# Altium PCB TN2020C.PCBDOC (part 2 of 2)
Units mil, origin at the board's own origin, x right, y up, seen from the top; angles counter-clockwise.
Board outline 6880.03 x 4310.03 mil, 2 copper layers (Top Layer, Bottom Layer); 174 components, 0 nets, 620 pads, 52 vias.
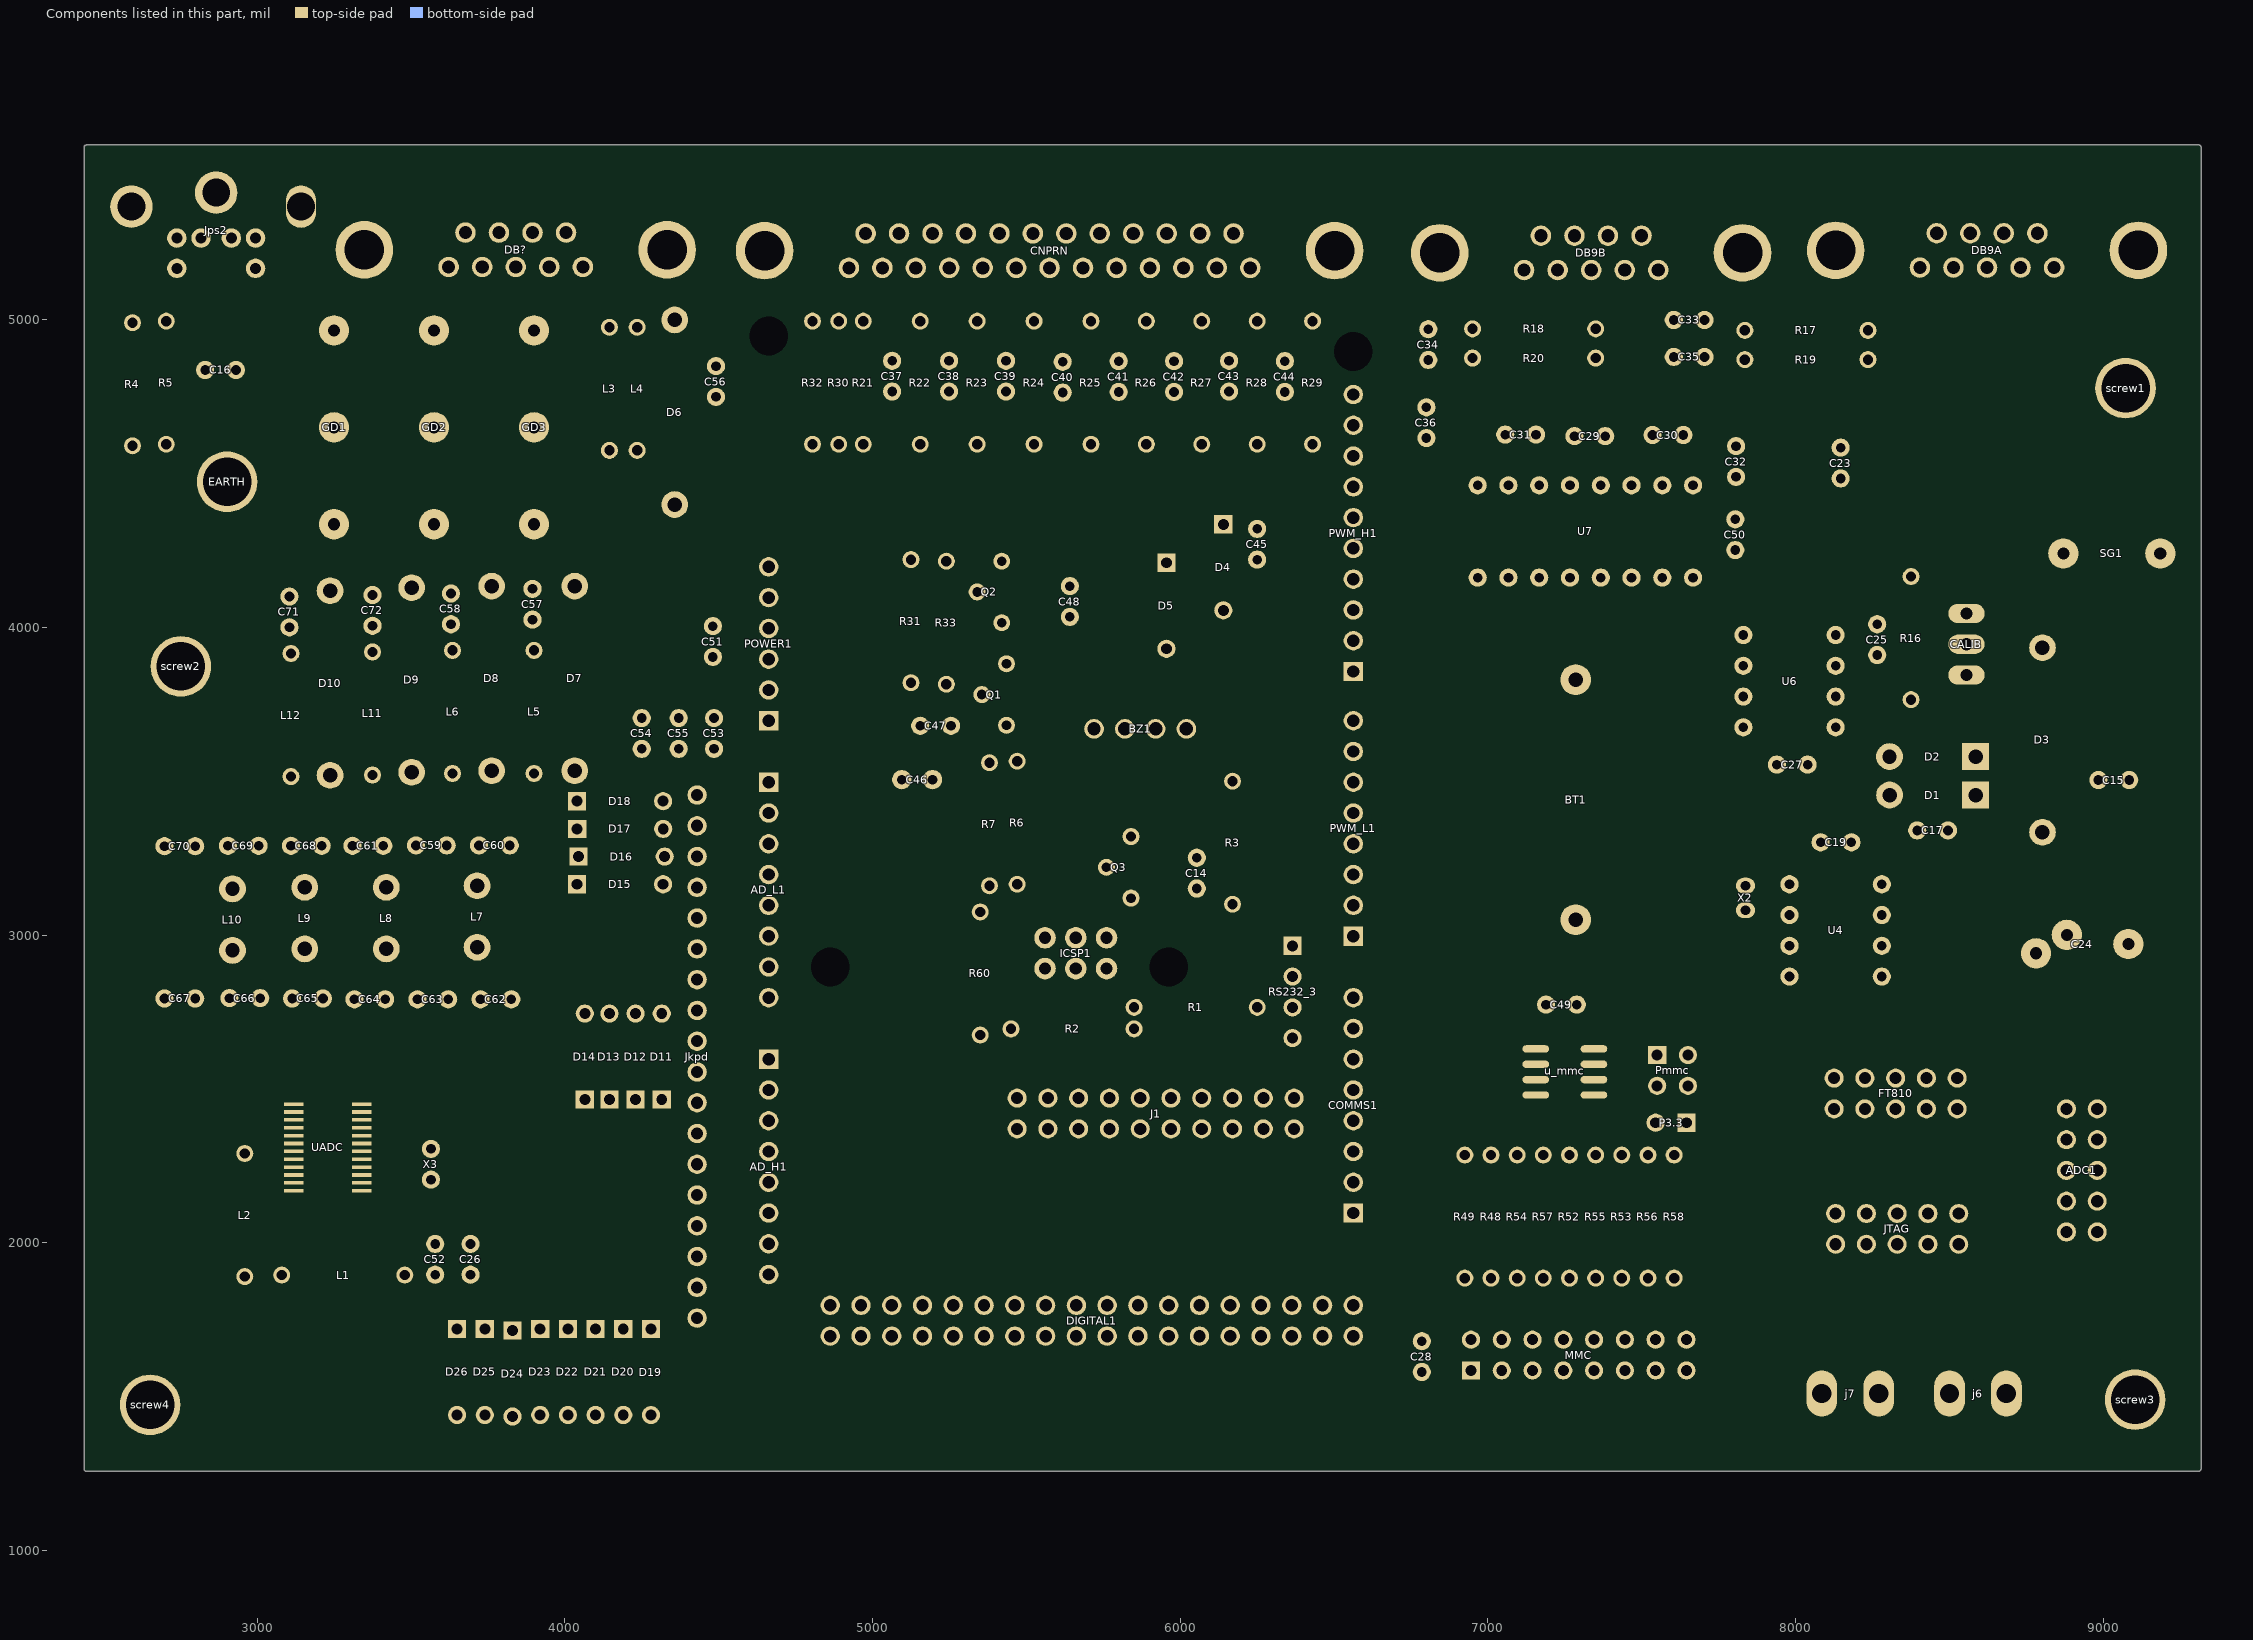
[diagram p2: the components of this part, seen from the top]

## Via types
v1: diameter 50, hole 28, Top Layer to Bottom Layer, 52 vias

## Nets (pads, with @x,y where several pads share a name; then routed paths per layer and width w, separated by ;. In a path a pad name is that pad's centre, name@x,y a point inside that pad or via, vN(x,y) a via of type N, cw(c..) or ccw(c..) an arc to the next point about the centre after c; other vN are vias at no path point) (continued)
copper on no net: | length 314893.9
  Top Layer w12: 2698.85,2793.74 2698.85,2406.15 2757.05,2347.95 3119.53,2347.95 3187.97,2347.95 3195,2340.92 3195,2296.77 ; 2865,2220 3119.53,2220 ; 2890,2195 2991.77,2195 2992.36,2194.41 3119.53,2194.41 ; 2908.82,2168.82 3119.53,2168.82 ; 2910,2795 2910,2555 2925,2540 3385,2540 3405,2520 3405,2457.34 3397.97,2450.31 3340,2450.31 ; v1(2915.28,2420) 2936.15,2399.13 3119.53,2399.13 ; 2960,1890 2962.5,1892.5 3077.5,1892.5 3080,1895 3160,1975 3442.97,1975 3450,1982.03 3450,2155 3436.18,2168.82 3340,2168.82 ; v1(3000,2485) 2845,2485 2820,2460 2820,2385 2831.46,2373.54 3119.53,2373.54 ; 3010,2795 3010.63,2794.37 3113.22,2794.37 3113.85,2793.74 ; 3119.53,2245.59 3187.97,2245.59 3195,2252.62 3195,2296.77 ; 3119.53,2271.18 2990.49,2271.18 2971.67,2290 2960,2290 2966.68,2296.68 ; 3119.53,2296.77 3119.43,2296.68 2966.68,2296.68 ; 3119.53,2322.36 2992.36,2322.36 2966.68,2296.68 ; 3119.53,2424.72 3254.72,2424.72 3255,2425 ; 3119.53,2450.31 3229.69,2450.31 3255,2425 ; 3155,2955 3155,2950.32 3113.85,2909.17 3113.85,2793.74 ; 3340,2220 3537.27,2220 3552.27,2205 3565,2205 ; 3340,2245.59 3510.59,2245.59 3565,2300 3565,2305 ; 3340,2271.18 3266.18,2271.18 3265,2270 ; 3340,2296.77 3266.77,2296.77 3265,2295 ; 3340,2322.36 3267.36,2322.36 3265,2320 ; 3340,2347.95 3272.03,2347.95 3265,2340.92 ; 3340,2373.54 3743.54,2373.54 v1(3770.74,2400.74) ; 3340,2399.13 3669.13,2399.13 v1(3770,2500) ; 3340,2424.72 3424.72,2424.72 3450,2450 3450,2555 3425,2580 3127.03,2580 3113.85,2593.18 3113.85,2793.74 ; 3693.74,1996.15 3578.74,1996.15 3578.74,2091.26 3475.59,2194.41 3340,2194.41 3272.03,2194.41 3265,2201.44 3265,2270 ; v1(4870,3180) 4905,3215 5325,3215 5380,3160 ; v1(5090,1940) 5097.27,1932.73 5097.27,1897.73 5115.06,1879.94 5115.06,1743.99 5162.56,1696.49 ; v1(5225,1960) 5225,1890 5210,1875 5210,1818.92 5210.06,1818.87 5210.06,1748.99 5262.56,1696.49 ; v1(5240,2845) 5234,2851 5191,2851 5160,2820 5160,2375 5300,2235 5565,2235 5961.04,1838.96 5961.04,1798 5962.56,1796.49 ; v1(5320,1905) 5315.06,1900.06 5315.06,1743.99 5362.56,1696.49 ; v1(5425,1920) 5425,1909.72 5415.06,1899.77 5415.06,1743.99 5462.56,1696.49 ; v1(5450,2030) 5510.06,1969.94 5510.06,1748.99 5562.56,1696.49 ; 5570,2370 5570,2261.11 5901.11,1930 6060,1930 6115.06,1874.94 6115.06,1743.99 6162.56,1696.49 ; v1(5625,2000) 5625,1831.11 5610.06,1816.16 5610.06,1746.97 5612.03,1745 5614.04,1745 5662.56,1696.49 ; 5670,2370 5670,2255 5938.5,1986.5 6106.73,1986.5 6210.06,1883.18 6210.06,1748.99 6262.56,1696.49 ; 5770,2370 5770,2225 5950,2045 6185,2045 6315.06,1914.94 6315.06,1743.99 6362.56,1696.49 ; 5770,2470 5823,2417 5823,2204.03 5952.03,2075 6200,2075 6362.56,1912.44 6362.56,1796.49 ; 5862.56,1796.49 5862.56,1897.44 5565.03,2194.97 5285.03,2194.97 5115,2365 5115,2850 5180,2915 5318.89,2915 5630,3226.11 5630,3426.11 5703.89,3500 6013.89,3500 6140,3626.11 6140,4055.24 ; 5870,2470 5923,2417 5923,2179.03 5962.03,2140 6225,2140 6462.56,1902.44 6462.56,1796.49 ; v1(6015,1870) 6015,1744.04 6062.56,1696.49 ; 6070,2470 6117,2423 6117,2263 6125,2255 v1(6365,2255) ; 6250,2765 6250,2764.51 6223,2737.51 6223,2417 6270,2370 ; 6806.26,4868.85 6857.41,4920 7155,4920 ; 7285,3830 7475,3830 7820,3485 8260.71,3485 8290.71,3455 8305.24,3455 ; 7603.85,4878.74 7603.85,4998.74 ; 7836.86,3080.58 7844.35,3073.08 7971.92,3073.08 7980,3065 ; 7836.86,3160.58 7839.07,3162.79 7977.79,3162.79 7980,3165 7980,3275 8006.26,3301.26 8081.15,3301.26 ; 8125,2535 8172.51,2487.49 8172.51,2367.49 8205,2335 8665,2335 8690,2360 ; 8365,4095 8375,4105 8375,4165 ; 8880,2135 8980,2135 ; v1(9145,2135) 9225,2135 9230,2130 ; 3195,2296.77 3263.23,2296.77 3265,2295 ; 3255,2425 3265,2415 3265,2340.92 ; 3265,2270 3265,2295 ; 3265,2295 3265,2320 ; 3265,2320 3265,2340.92
  Top Layer w15: 2595,4590 2595,4415 2960,4050 2960,3755 3062.97,3652.03 4504.48,3652.03 4561.51,3595 4765,3595 4860,3690 v1(5070,3690) ; 2705,4595 2705,4506.45 2977.45,4234 v1(3431,4234) ; 2865,2220 2795,2150 2795,1865 3075,1585 4480,1585 4560,1665 4560,2080 4576.49,2096.49 4662.56,2096.49 ; 2890,2195 2835,2140 2835,1875 3090.01,1619.99 3095,1615 4474.64,1615 4535,1675.36 4535,2180 4551.49,2196.49 4662.56,2196.49 ; 2908.82,2168.82 2865,2125 2865,1895 3115,1645 4460,1645 4510,1695 4510,2265 4541.49,2296.49 4662.56,2296.49 ; 3480,1895 3480.57,1895.57 3578.17,1895.57 3578.74,1896.15 3693.74,1896.15 ; 4040,3165 3981.21,3106.21 3981.21,2065 3991.21,2055 4430,2055 ; 4040,3435 3913.79,3435 3905,3426.21 3905,1845 3940,1810 4375,1810 4430,1755 ; 4040.24,3345 3940,3345 3931.21,3336.21 3931.21,1903.79 3980,1855 4430,1855 ; 4045,3255 4040,3260 3985,3260 3956.21,3231.21 3956.21,1980 3981.21,1955 4430,1955 ; 4065,2465.24 4065,2210 4120,2155 4430,2155 ; 4065,2744.76 4070,2749.76 4070,3020 4105,3055 4430,3055 4515,3055 4555,3095 4661.07,3095 4662.56,3096.49 ; 4145,2465.24 4145,2300 4190,2255 4430,2255 ; 4145,2749.76 4145,2920 4180,2955 4430,2955 4535,2955 4576.49,2996.49 4662.56,2996.49 ; 4145,4575 4145,4765 4228.85,4848.85 4491.26,4848.85 ; 4230,2465.24 4235,2460.24 4235,2385 4265,2355 4430,2355 ; 4230,2744.76 4230,2825 4260,2855 4430,2855 4510,2855 4551.49,2896.49 4662.56,2896.49 ; 4315,2465.24 4325.24,2455 4430,2455 ; 4315,2744.76 4320.12,2749.88 4424.88,2749.88 4430,2755 4435,2760 4530,2760 4566.49,2796.49 4662.56,2796.49 ; 4319.76,3345 4324.76,3350 ; 4357.13,4998.94 4476.06,4998.94 4491.26,4983.74 4491.26,4848.85 ; 4425,3350 4430,3355 ; 4430,2555 4525,2555 4583.51,2496.49 4662.56,2496.49 ; 4430,2655 4604.04,2655 4662.56,2596.49 ; 4548.85,4003.85 4565,4020 4565,4825 4543.29,4846.71 4493.4,4846.71 4491.26,4848.85 ; v1(4640,4515) 4640,4355 4800,4195 4800,4105.27 4791.21,4096.49 4662.56,4096.49 ; 4662.56,4196.49 4663.3,4195.74 ; v1(4950,1375) 4952.5,1377.5 7712.5,1377.5 v1(7715,1380) ; 4962.56,1796.49 4975.54,1796.49 4996.43,1775.61 4999.39,1775.61 5013.56,1761.44 5013.56,1501.29 5031.87,1482.97 7422.97,1482.97 7445,1505 7445,1585 7445,1685 7440,1690 7440,1880 7435,1885 ; 5062.56,1696.49 5062.56,1526.29 5080.87,1507.97 7267.97,1507.97 7345,1585 7345,1685 7342.97,1687.03 7342.97,1737.03 7265,1815 7265,1885 ; 5062.56,1796.49 5062.56,1852.44 5050,1865 4930,1865 4913.56,1848.56 4913.56,1451.44 4945,1420 7490,1420 7545,1475 7545,1585 7545,1685 7545,1765 7605,1825 7605,1885 ; 5355.41,3781.47 5355.41,3595.44 5380,3570.86 5380,3560 ; 5435.41,3681.47 5435.41,3601.21 5470,3566.62 5470,3565 ; 5450,2695 5375,2620 5375,2400 5405,2370 5470,2370 ; 5470,2580 5490,2600 v1(6180,2600) 6175,2605 6175,2910 6230,2965 ; 5470,3165 5470,3420 5585,3535 5585,3580 5615,3610 5896.21,3610 5910.62,3624.41 5910.62,3660.62 5920,3670 6020,3670 ; 5570,2470 5618.5,2421.5 5618.5,2251.5 5910,1960 6100,1960 6162.56,1897.44 6162.56,1796.49 ; 5662.56,1796.49 5711.56,1747.49 5711.56,1551.29 5729.87,1532.97 7192.97,1532.97 7245,1585 7245,1685 ; 5670,2470 5718.5,2421.5 5718.5,2241.5 5940,2020 5940,2018.79 5948.79,2010 6150,2010 6262.56,1897.44 6262.56,1796.49 ; 5720,3670 5820,3670 5820,3795.24 5955,3930.24 ; 5760,3220 6011.31,3220 6042.46,3251.15 6053.74,3251.15 6143.85,3251.15 6165,3230 6165,3105 6170,3100 ; 5870,2370 5870,2198.8 5958.8,2110 6205,2110 6413.56,1901.44 6413.56,1745.49 6462.56,1696.49 ; 6053.74,3151.15 6053.74,3077.47 6166.21,2965 6230,2965 ; 6070,2370 6070,2250 6125,2195 v1(6315,2195) ; 6365,2965 6230,2965 ; 6562.56,2096.49 6921.49,2096.49 6965,2140 6965,2165 7005,2205 7005,2280 7010,2285 ; 6562.56,2196.49 6831.49,2196.49 6920,2285 6925,2285 6795,2415 6795,2730 6995,2930 7765,2930 7915,2780 8251.21,2780 8280,2808.79 8280,2865 ; 6562.56,3296.49 6569.44,3303.37 7706.03,3303.37 7832.66,3430 v1(8055,3430) ; 6562.56,3596.49 7048.51,3596.49 v1(7070,3575) ; 6562.56,3856.49 6913.51,3856.49 7190,3580 7190,3445 v1(7135,3390) ; 6562.56,3956.49 6575.54,3956.49 6594.06,3975 7830,3975 7830,3875 7830,3775 ; v1(6680,3125) 7165,3125 7200,3160 v1@7205.18,3154.82 ; v1(6735,3010) 6937.24,3010 6952.24,3025 7145,3025 7185,2985 v1(7185,2980) ; 6800,4715 6870,4715 ; 6950,4875 6915,4875 6900,4860 6900,4745 6870,4715 ; 6950,4970 6949.43,4969.43 6806.83,4969.43 6806.26,4968.85 6805.11,4970 6730,4970 6700,4940 6700,4400 6730,4370 7050,4370 7066.63,4386.63 7066.63,4461.46 ; 6966.63,4161.46 6966.63,4078.37 6985,4060 v1(7135,4060) ; 6966.63,4461.46 6888.79,4461.46 6880,4470.25 6880,4705 6870,4715 ; v1(7045,4285) 7245,4285 7265,4265 7265,4163.09 7266.63,4161.46 ; 7155.51,2530 6960,2530 6900,2590 6900,2675 6945,2720 7350,2720 7405,2775 v1(7555,2775) ; 7155.51,2580 6973.79,2580 6965,2588.79 6965,2655 6996.71,2686.71 7379.21,2686.71 7402.5,2710 7758.71,2710 7767.5,2701.21 7767.5,2427.5 7632.68,2292.68 7612.68,2292.68 7605,2285 ; 7155.51,2630 7235,2630 7245,2620 7245,2390 7187.68,2332.68 7187.68,2292.68 7180,2285 ; 7344.49,2480 7416.21,2480 7425,2471.21 7425,2450 7350,2375 7350,2285 ; 7344.49,2530 7440,2530 7450,2520 7450,2375 7435,2360 7435,2285 7520,2285 ; 7344.49,2580 7460,2580 7500,2540 7500,2520 7501.57,2518.43 7541.57,2518.43 7550,2510 ; 7344.49,2630 7450,2630 7500,2680 7733.71,2680 7742.5,2671.21 7742.5,2522.5 7725,2505 7655,2505 7650,2510 ; 7466.63,4161.46 7466.63,4228.37 7450,4245 7335,4245 7315,4225 7315,4085 7360,4040 7875,4040 7935,4100 7935,4935 7905,4965 7835,4965 7831.69,4965 7797.95,4998.74 7703.85,4998.74 ; 7666.63,4161.46 7666.63,4246.63 7670,4250 ; v1(7735,2085) 7737.5,2082.5 7737.5,1797.5 v1(7740,1795) ; v1(7910,2190) 7915,2185 7915,2140 ; v1(7915,2330) 7910,2335 7910,2690 7936.5,2716.5 8291.5,2716.5 8370,2795 8370,2875 8280,2965 ; v1(7965,2560) 7965,2565 8015,2615 8651.21,2615 8660,2606.21 8660,2400 8630,2370 8433.79,2370 8425,2378.79 8425,2435 ; v1(8075,2170) 8190.34,2170 8215.34,2195 8321.21,2195 8330,2186.21 8330,2095 ; 8125,2435 8065,2435 7995,2365 7995,2325 ; 8125,2535 8010,2535 7957.5,2482.5 7957.5,1962.5 8030,1890 8215,1890 8230,1905 8230,1995 ; 8130,1995 8055,1995 7995,2055 7995,2325 ; 8130,3675 8680,3675 8690,3665 8690,3055 v1(8500,2865) ; 8130,3875 8133.58,3875 8168.58,3910 8265,3910 ; 8146.26,4583.85 8846.15,4583.85 8865,4565 8865,4245.04 8870.04,4240 ; 8181.15,3301.26 8356.26,3301.26 8395,3340 ; v1(8225,2260) 8570,2260 8665,2165 8665,1930 ; 8280,3165 8395,3280 8395,3340 ; 8375,3765 8300,3765 8265,3800 8265,3910 ; 8530,1995 8595,1930 8665,1930 ; 8555,3945 8395,3945 8360,3910 8265,3910 ; 8555,4045 8797.13,4045 8802.13,4050 ; 8584.53,3580 8584.53,3455.24 8584.76,3455 8420,3455 8395,3430 8395,3340 ; 8690,2360 8705,2360 8780,2435 8880,2435 ; v1(8760,2655) 9106.21,2655 9115,2646.21 9115,2343.79 9106.21,2335 8980,2335 ; 8880,2235 8650,2235 8573.5,2311.5 8195.27,2311.5 8181.77,2325 7995,2325 ; 8980,2235 9066.21,2235 9075,2226.21 9075,1938.79 9066.21,1930 8665,1930
  Top Layer w15.75: 4805,4595 4805,4385 5054.35,4135.65 5054.35,3880 5114.35,3820 5125,3820 ; 4890,4595 4890,4455 5125,4220 ; 4890,4995 4890,5060 4835,5115 4835,5255 4860,5280 4977.6,5280 ; 5195,3505 5195,3620 5255,3680 5255,3687.83 5182.82,3760.01 5182.82,4162.18 5125,4220 ; 5240,4215 5340,4115 ; 5420,4015 5610.69,4015 5629.54,4033.85 5641.26,4033.85 ; 5840,3120 5845,3115 5845,2770 5850,2765 5850,2695 ; 5955,4209.76 5879.09,4133.85 5641.26,4133.85 5641.26,4253.74 5579.98,4315.02 5575,4320 5225,4320 5125,4220
  Top Layer w20: 2595,4990 2595,5105 2656.57,5166.57 2739.09,5166.57 ; 2698.85,2793.74 2698.85,3288.74 ; 2705,4995 2800,4995 2817.83,5012.83 2817.83,5265 ; 2798.85,2793.74 2799.48,2794.37 2909.37,2794.37 2910,2795 2915,2800 2915,2945 2920,2950 ; 2831.15,4836.26 2568.74,4836.26 2530,4875 ; 2867.05,5412.64 2857.56,5403.15 2768.15,5403.15 2739.09,5374.09 2739.09,5265 2635,5265 2530,5160 2530,4875 ; 2902.4,4472.99 4007.01,4472.99 4305,4175 4305,3940 4341.15,3903.85 4391.72,3903.85 ; 2920,3150 2815,3150 2798.85,3166.15 2798.85,3288.74 2799.48,3289.37 2904.37,3289.37 2905,3290 2905,3380 3040,3515 3110,3515 ; 2931.15,4836.26 3080,4985.11 3080,5180 2995,5265 ; 3005,3290 3110,3290 ; 3155,3155 3110,3200 3110,3290 ; 3210,3300.57 3210,3290 3310,3290 3313.07,3286.93 3313.07,2794.33 3316.15,2791.26 3310,2785.11 3310,2700 3325,2685 3810,2685 3826.15,2701.15 3826.15,2791.26 3823.65,2793.76 3823.65,3288.76 3821.15,3291.26 ; 3250,4650 3575,4650 3900,4650 3909.57,4640.43 3962.45,4640.43 4203.94,4398.94 4357.13,4398.94 ; 3250,4964.96 3379.96,4964.96 3530,5115 3530,5250 3562.81,5282.81 3676.99,5282.81 ; 3375,3520 3375,3440 3330,3395 3175,3395 3117.47,3337.47 3117.47,3297.47 3110,3290 ; 3375,3920 3485,3920 3502.13,3937.13 3502.13,4128.94 3484.1,4128.94 3460.16,4105 3375,4105 ; 3420,2955 3418.07,2953.07 3418.07,2793.19 3416.15,2791.26 3521.15,2791.26 ; 3420,3155 3415,3160 3415,3285 3410,3290 3410.63,3290.63 3515.52,3290.63 3516.15,3291.26 3516.15,3406.15 3635,3525 ; 3575,4335 3710,4335 3762.13,4282.87 3762.13,4133.94 ; 3575,4964.96 3579.96,4960 3725,4960 3835,5070 3925,5070 3949.63,5094.63 3949.63,5171 ; 3616.15,3291.26 3721.15,3291.26 ; 3621.15,2791.26 3726.15,2791.26 3720.57,2796.83 3720.57,2954.43 3715,2960 ; 3630,4110 3720.16,4110 3744.1,4133.94 3762.13,4133.94 ; 3635,3925 3740,3925 3760,3945 3760,4131.81 3762.13,4133.94 ; 3715,3160 3718.07,3163.07 3718.07,3288.19 3721.15,3291.26 ; 3895,4125 3899.47,4129.47 4027.66,4129.47 4030,4131.81 ; 3900,3525 3755,3380 3745,3380 3721.15,3356.15 3721.15,3291.26 ; 3900,3925 4018.28,3925 4030,3936.72 4030,4131.81 ; 3900,4964.96 3905.02,4969.98 4139.98,4969.98 4145,4975 4058.68,5061.32 4058.68,5171 ; 4032.13,4133.94 4030,4131.81 ; 4235,4575 4344.38,4465.62 4344.38,4411.69 4357.13,4398.94 ; 4319.53,3165 4324.53,3160 4425,3160 4430,3155 4505,3155 4546.49,3196.49 4662.56,3196.49 ; 4319.53,3435 4398.37,3435 4418.37,3455 4430,3455 4430,3460 4466.49,3496.49 4662.56,3496.49 ; 4324.53,3255 4430,3255 4510,3255 4551.49,3296.49 4662.56,3296.49 ; 4324.76,3350 4425,3350 ; 4430,3355 4560,3355 4601.06,3396.06 4662.12,3396.06 4662.56,3396.49 ; 4485,3705 4483.13,3706.87 4483.13,3901.98 ; 4491.26,4748.85 4491.26,4431.26 4458.94,4398.94 4357.13,4398.94 ; 4662.56,3796.49 4662.56,3896.49 4658.87,3900.17 4484.94,3900.17 4483.13,3901.98 ; 4862.56,1796.49 4862.56,2032.56 4985,2155 4985,3003.28 4973.28,3015 4895,3015 4780,3130 4780,3425 4860,3505 5095,3505 5095,3620 5155,3680 ; 4900,1292.5 4897.5,1295 3150,1295 2735,1710 2555,1710 2530,1735 2530,4875 ; 4962.56,1696.49 4962.56,1512.44 5025,1450 7455,1450 v1(7485,1480) ; v1(5310,2795) 5541.17,2795 5552.89,2783.28 5552.89,2662.89 5490,2600 ; 5412.4,5280 5521.1,5280 5629.8,5280 5738.5,5280 5847.21,5280 5955.91,5280 6064.61,5280 6073.51,5288.9 6073.51,5341.94 6123.28,5391.72 6125,5390 6290,5390 6322.68,5357.32 6322.68,4954.39 6313.28,4945 6300,4945 6250,4895 6250,4795 6221.15,4766.15 6158.74,4766.15 ; 5470,2470 5470,2580 ; v1(5915,4055) 6010,4055 6175,4220 6250,4220 ; 6140,4334.76 6224.67,4334.76 6239.43,4320 6250,4320 6430,4500 6430,4595 ; v1(6230,3700) 6450,3480 6450,2580 ; 6270,2470 6270,2570 6365,2665 6450,2580 ; 6785,1580 6787.5,1582.5 6942.5,1582.5 6945,1585 6945,1685 6945,1750 6970,1775 7155,1775 7180,1800 7180,1885 7180,1958.28 7191.72,1970 7338.28,1970 ; 6785,1680 6590.68,1680 6574.19,1696.49 6562.56,1696.49 6562.56,1796.49 ; 6800,4615 6797.91,4617.09 6757.91,4617.09 6735,4640 6735,4838.28 6758.1,4861.38 6798.79,4861.38 6806.26,4868.85 ; 7010,1885 6925,1885 6800,1885 6711.49,1796.49 6562.56,1796.49 ; 7045,1585 7045,1685 ; 7056.15,4626.26 7164.01,4518.4 7164.01,4464.08 7166.63,4461.46 ; 7095,2285 7180,2285 ; 7145,1585 7145,1685 ; 7155.51,2480 6875,2480 6845,2510 6845,2720 6898.74,2773.74 7188.85,2773.74 7188.85,2828.85 7250,2890 7745,2890 7855,2780 v1(7855,2550) 7852.5,2547.5 7852.5,2057.5 v1(7850,2055) 7855,2050 7855,1585 ; 7156.15,4626.26 7155,4627.41 7155,4800 ; 7265,2285 7350,2285 ; 7266.63,4461.46 7266.63,4596.18 7281.15,4610.69 7281.15,4621.26 ; 7288.85,2773.74 7360.11,2845 7725,2845 7795,2775 v1(7795,1705) ; 7335.57,5161 7343.28,5153.29 7343.28,4976.72 7350,4970 ; 7350,1885 7350,1958.28 7338.28,1970 ; 7350,4875 7420,4875 7444.63,4899.63 7444.63,5161 ; 7366.63,4161.46 7366.63,4091.72 7378.35,4080 7830.86,4080 7900,4149.14 7900,4805 7835,4870 7830.63,4874.37 7708.22,4874.37 7703.85,4878.74 ; 7366.63,4461.46 7366.63,4596.18 7381.15,4610.69 7381.15,4621.26 ; 7466.63,4461.46 7466.63,4556.63 7535,4625 ; 7520,1885 7520,1963.28 7526.72,1970 ; 7566.63,4161.46 7566.63,4291.63 7605,4330 7772.5,4330 7793.64,4351.15 7803.74,4351.15 7811.21,4358.62 7853.28,4358.62 7865,4370.34 7865,4698.28 7853.28,4710 7705,4710 7603.85,4811.15 7603.85,4813.85 ; 7566.63,4461.46 7570,4458.09 7570,4386.72 7581.72,4375 7700,4375 7806.26,4481.26 7806.26,4488.85 ; 7603.85,4878.74 7603.85,4813.85 ; 7635,4625 7635,4614.43 7666.63,4582.8 7666.63,4461.46 ; v1(7645,1455) v1(7915,1455) ; 7670,4250 7802.59,4250 7803.74,4251.15 ; v1(7915,1725) 7915,2140 ; 7938.85,3553.74 7938.85,3559.94 7830,3668.8 7830,3675 7890,3675 7980,3765 7980,4317.59 8146.26,4483.85 ; 8080,1515 8085,1510 8085,1521.86 8080,1526.86 8021.86,1585 7855,1585 ; 8130,3975 8219.43,3975 8254.43,4010 8265,4010 8272.5,4010 8357.5,4095 8365,4095 8477.44,4095 8527.44,4045 8555,4045 ; 8235,4870 8700,4870 8730.98,4900.98 8730.98,5169.1 ; 8235,4965 8555,4965 8621.93,5031.93 8621.93,5169.1 ; 8403.82,5169.1 8394.92,5178 8357,5178 8350,5185 8350,5378.28 8338.28,5390 7086.72,5390 7075,5378.28 7075,5208.01 7117.46,5165.54 7117.46,5161 7117.46,5047.54 7155,5010 7155,4920 7155,4800 ; 4357.13,4398.94 4357.13,3938.44 4391.72,3903.85 ; 4391.72,3903.85 4481.26,3903.85 4483.13,3901.98 ; 6450,2580 6450,2010 6562.56,1897.44 6562.56,1796.49 ; 7155,4800 7590,4800 7603.85,4813.85 ; 7338.28,1970 7526.72,1970 ; 7526.72,1970 7555,1970 7560,1975 7663.28,1975 7675,1963.28 7675,1820 7645,1790 7645,1685 7645,1585 7855,1585
  Top Layer w40: 4481.26,4003.85 4486.42,4003.85 4493.78,3996.49 4662.56,3996.49
  Top Layer w50: 4862.56,1796.49 4862.56,1696.49 4862.56,1336.79 4891.85,1307.5 8470.71,1307.5 8500,1336.79 8500,1510 8500,1650.71 8470.71,1680 8109.29,1680 8080,1650.71 8080,1526.86 ; 8685,1510 8685,1521.47 8708.1,1544.57 8719.57,1544.57 8945,1770 9200.71,1770 9230,1799.29 9230,2130 9230,2625 9225,2630 9225,2941.38 9195.71,2970.67 9081.3,2970.67 9082.57,2971.95 9082.57,3502.46 9083.85,3503.74 9083.85,3900.71 9050.62,3933.94 8802.13,3933.94 8802.13,4050 8802.13,4158.98 8870.04,4226.9 8870.04,4240
  Bottom Layer w12: v1(4870,3180) 4966.55,3083.45 4966.55,2761 4795,2589.45 4795,1577.03 4802.03,1570 5700,1570 5762.56,1632.56 5762.56,1696.49 ; v1(5240,2845) 5235,2850 5235,3184.32 5029,3390.32 5029,3730.5 5043.5,3745 5215,3745 5239.44,3769.44 5239.44,3814.44 5240,3815 ; 5350,2675 5354.43,2675 5384.43,2645 6283.66,2645 6303.66,2665 6365,2665 ; 5562.56,1796.49 5562.56,2007.44 5305,2265 5305,2530 5365,2590 6075,2590 6123,2542 6123,2417 6170,2370 ; v1(5625,2000) 5677.79,2000 5832.79,2155 5962.97,2155 5970,2162.03 5970,2370 ; 6062.56,1796.49 6062.56,1907.56 6160,2005 6367.97,2005 6375,2012.03 6375,2228.97 6372.27,2231.7 6372.27,2247.73 v1(6365,2255) ; 6365,2765 6430,2700 6430,2590 6513.75,2506.25 6552.8,2506.25 6562.56,2496.49 ; 6365,2865 6455,2775 6455,2620 6478.51,2596.49 6562.56,2596.49 ; 8230,2095 8239,2104 8239,2144 8525,2430 8525,2435 8585,2435 8635,2385 8635,2210 8710,2135 8880,2135 ; 8980,2135 v1(9145,2135)
  Bottom Layer w15: 2931.15,4836.26 2935,4840.11 2935,5081.21 2926.21,5090 2520,5090 2485,5055 2485,1720 2500,1705 2710,1705 3107.5,1307.5 3509.29,1307.5 ; 3250,4335 3120,4465 3120,5030 3165,5075 3440,5075 3525,5160 3525,5305 3585,5365 3703.85,5365 3786.05,5282.81 ; v1(3431,4234) 3431,4096 3468,4059 3820,4059 3834,4073 4303.1,4073 4720,4489.9 4720,4600 4775,4655 6291.21,4655 6300,4646.21 6300,4510 6190,4400 6100,4400 6030,4330 6030,3938.89 6103.89,3865 6394.04,3865 6562.56,3696.49 ; 3650,1440.24 3740,1440.24 3742.5,1437.74 3827.5,1437.74 3830,1435.24 3832.5,1437.74 3917.5,1437.74 3920,1440.24 4010,1440.24 4100,1440.24 4190,1440.24 4190.12,1440.12 4279.88,1440.12 4280,1440 4485,1440 4545,1500 4545,2340 4601.49,2396.49 4662.56,2396.49 ; 3650,1719.76 4315,2384.76 4315,2465.24 ; 3740,1719.76 4375.24,2355 4430,2355 ; 3830,1714.76 3830,1765 4320,2255 4430,2255 ; 3920,1719.76 3925,1724.76 3925,1805 4275,2155 4430,2155 ; 4010,1719.76 4010,1770 4300,2060 4425,2060 4430,2055 ; 4100,1719.76 4100,1790 4265,1955 4430,1955 ; 4190,1719.76 4190,1795 4250,1855 4430,1855 ; 4280,1719.53 4389.11,1719.53 4424.58,1755 4430,1755 ; v1(4640,4515) 4646.7,4521.7 4646.7,4538.51 4649.47,4541.29 4649.47,4609.47 4745,4705 4745,5075 4830,5160 4830,5345 4900,5415 5605,5415 5630,5390 6300,5390 6330,5360 6330,5175 6470,5035 6540,5035 6540,5036.21 6863.79,5036.21 6890,5010 6890,4445 6740,4295 6740,3015 v1(6735,3010) ; 4662.56,4196.49 4748,4196.49 4768,4176.49 4768,3157 4943.05,2981.95 4943.05,2770.73 4756.79,2584.47 4756.79,1387 4768.79,1375 v1(4950,1375) ; 4805,4995 4812.68,5002.68 4812.68,5057.62 4923.25,5168.19 ; 4970,4595 4970,4505 4815,4350 4815,3315.1 4990.05,3140.06 4990.05,2099.95 5090,2000 v1(5090,1940) ; 5031.95,5168.19 4970,5106.24 4970,4995 4977.68,4987.32 4977.68,4952.21 5063.74,4866.15 ; v1(5070,3690) 5070,3645 5115,3600 5255,3600 5265,3590 5265,3465 5280,3450 6045,3450 6298.51,3196.49 6562.56,3196.49 ; 5140.65,5168.19 5140.65,5020.21 5155,5005.86 5155,4995 5162.68,4987.32 5162.68,4952.21 5248.74,4866.15 ; 5155,4595 5155,4525 5120.06,4490.06 4995.06,4490.06 4845,4340 4845,3320.46 5020,3145.46 5020,2145 5162.56,2002.44 5162.56,1796.49 ; v1(5225,1960) 5218.3,1966.7 5218.3,1987.05 5045,2160.36 5045,3160 4870,3335 4870,4325 5010,4465 5330,4465 5340,4475 5340,4595 ; 5249.35,5168.19 5249.35,5085.65 5340,4995 5347.68,4987.32 5347.68,4952.21 5433.74,4866.15 ; 5262.56,1796.49 5262.56,1933.52 5285,1955.96 5285,1973.93 5088.93,2170 5088.79,2170 5080,2178.79 5080,3164.67 4895,3349.67 4895,4300 5025,4430 5500,4430 5525,4455 5525,4595 ; v1(5320,1905) 5320,1974.29 5110,2184.29 5110,3170.02 4922.68,3357.34 4922.68,4292.32 5027.68,4397.32 5340.18,4397.32 5347.5,4390 5660,4390 5710,4440 5710,4595 ; 5358.05,5168.19 5358.05,5165.07 5525,4998.12 5525,4995 5532.68,4987.32 5532.68,4948.27 5618.07,4862.88 ; 5362.56,1796.49 5362.56,1967.09 5140,2189.64 5140,3175.38 4950,3365.38 4950,4275 5030,4355 5800,4355 5890,4445 5890,4595 ; v1(5425,1920) 5387.56,1957.44 5387.56,1982.44 5172.5,2197.5 5172.5,3178.23 4980.5,3370.23 4980.5,4235.5 5065,4320 5909.64,4320 6070,4480.36 6070,4595 ; v1@5452.5,2027.5 v1(5450,2030) 5260,2220 5260,2565 5310,2615 6090,2615 6170,2535 6170,2470 ; 5462.56,1796.49 5462.56,1852.56 5475,1865 5475,1940 5224.99,2190.01 5220,2195 5197.5,2217.5 5197.5,3188.59 5005.5,3380.59 5005.5,4215.5 5070,4280 5935,4280 6250,4595 ; 5466.75,5168.19 5639.94,4995 5710,4995 5717.68,4987.32 5717.68,4947.32 5800,4865 ; 5684.15,5168.19 5777.34,5075 5895,5075 5975,4995 6070,4995 6077.68,4987.32 6077.68,4947.21 6158.74,4866.15 ; 5792.86,5168.19 5792.86,5112.14 5805,5100 5935,5100 5939.99,5095.01 5985,5050 6195,5050 6250,4995 6257.68,4987.32 6257.68,4947.32 6340,4865 ; v1@6013.56,1870 6013.56,1928.56 6165,2080 6306.21,2080 6315,2088.79 v1(6315,2195) ; 6171.76,3498.24 6170,3500 6260,3500 6360,3400 6559.04,3400 6562.56,3396.49 ; v1(6180,2600) 6189.47,2600 6214.47,2575 6330,2575 6370,2535 6370,2470 6370,2370 ; 6562.56,2296.49 6671.49,2296.49 6695,2320 6695,2595 6920,2820 6920,3650 7135,3865 v1(7135,4060) ; 6562.56,2396.49 6636.21,2396.49 6645,2405.27 6645,2620 6885,2860 6885,3695 7075,3885 7075,4153.09 7066.63,4161.46 ; 6562.56,2696.49 6666.49,2696.49 6845,2875 6845,4180 6950,4285 v1(7045,4285) ; 6562.56,2796.49 6726.49,2796.49 6800,2870 6800,4225 6910,4335 7135,4335 7166.63,4303.37 7166.63,4161.46 ; 6562.56,3496.49 6668.51,3496.49 6680,3485 v1(6680,3125) ; 7010,2285 7010,2180 7030,2160 7625,2160 7795,2330 v1(7915,2330) v1@7908.3,2336.7 ; v1(7070,3575) 7069.5,3574.5 7344,3300 7568,3300 7604,3264 7604,3055 7694,2965 7980,2965 ; 7095,1885 7095,1808.79 7103.79,1800 7215,1800 7245,1770 7245,1685 ; v1@7130,3395 v1(7135,3390) 7870,2655 v1(8760,2655) ; v1(7185,2980) 7280,2885 7426.21,2885 7435,2876.21 7435,2485 7475,2445 7631.21,2445 7644.19,2457.97 7644.19,2504.19 7650,2510 ; v1@7205.18,3154.82 7330.18,3154.82 7865,2620 8315,2620 8325,2610 8325,2535 ; 7265,1885 7265,2005 7322.21,2062.21 7616.85,2062.21 7802.14,2247.5 8002.59,2247.5 8017.59,2262.5 8111.96,2262.5 8114.46,2260 v1(8225,2260) ; 7435,1885 7435,1965 7465,1995 8130,1995 ; 7550,2610 7555,2615 v1(7555,2775) ; 7605,1885 8200,1885 8230,1915 8230,1995 ; 7645,2390 7650,2395 7650,2510 ; v1(7715,1380) 7715,1760.53 7740,1785.53 v1@7740,1790 ; v1(7735,2085) 7787.5,2137.5 8040.32,2137.5 8072.82,2170 v1(8075,2170) ; 7806.26,4588.85 7808.76,4586.35 7868.65,4586.35 8143.76,4586.35 8146.26,4583.85 ; v1(7910,2190) 7916.7,2183.3 7978.35,2183.3 8025.05,2230 8126.21,2230 8135,2221.21 8135,2200 8160,2175 8230,2175 8325,2270 8325,2435 ; v1(7965,2560) 7912.5,2507.5 7652.5,2507.5 7650,2510 ; 8038.85,3553.74 8259.26,3553.74 8285.52,3580 8305,3580 8450,3725 8450,3810 8380,3880 8380,4160 8375,4165 ; v1(8055,3430) 8020,3395 8020,3271 8226,3065 8280,3065 ; 8130,3775 7991,3636 7991,3254 8280,2965 ; v1@8225,2275 8225,2435 ; 8280,2865 v1(8500,2865) ; 8495,3340 8498.03,3336.97 8799.1,3336.97 8802.13,3333.94 ; 8555,3845 8730,3845 8983.85,3591.15 8983.85,3503.74
  Bottom Layer w15.75: 4977.6,5280 4975,5282.6 4975,5360.77 4984.23,5370 5185.77,5370 5195,5360.77 5195,5280 ; 5125,3820 5125,3980 5160,4015 5420,4015
  Bottom Layer w19.68: 5579.62,5164.02 5698.64,5045 5870,5045 5883.22,5031.78 5883.22,5001.78 5890,4995 5896.78,4988.22 5896.78,4948.22 5980,4865 ; 6010.26,5168.19 6019.22,5159.23 6019.22,5110.78 6040,5090 6344.59,5090 6430,5004.59 6430,4995
  Bottom Layer w20: 2698.85,2793.74 2698.85,2711.15 2715,2695 3188.28,2695 ; v1(2915.28,2420) 2905,2420 2905,2570 2950,2615 3375,2615 3416.15,2656.15 3416.15,2791.26 ; v1(3000,2485) 3000,2543.28 3011.72,2555 3570,2555 3620,2605 3620,2790.11 3621.15,2791.26 ; 3080,1895 3080,1950 3220,2090 3775,2090 3830,2145 3830,2412.5 4010,2592.5 4010,2847.34 4235,3072.34 4235,3460 4315,3540 4420,3540 4485,3605 ; 3105,4000 3107.5,4002.5 3372.5,4002.5 3375,4005 3377.5,4007.5 3627.5,4007.5 3630,4010 3640.57,4010 3655.57,4025 3895,4025 4142.7,4025 4263.85,3903.85 ; 3110,3915 3105,3910 3060,3910 3020,3950 3020,4075 3045,4100 3105,4100 3112.47,4107.47 3152.35,4107.47 3163.82,4118.94 3237.13,4118.94 3243.56,4125.38 3243.56,4328.56 3250,4335 ; 3210,3290 3210,3473.79 3237.13,3500.91 3237.13,3518.94 3242.25,3524.06 3242.25,3592.25 3275,3625 3510,3625 ; 3213.85,2793.74 3213.85,2720.57 3188.28,2695 ; 3250,4964.96 3390,4824.96 3390,4760 3375,4745 3375,4105 ; 3316.15,2791.26 3316.15,2706.72 3304.43,2695 3188.28,2695 ; 3502.13,3528.94 3502.13,3617.13 3510,3625 ; 3575,4335 3731.52,4491.52 3731.52,5171 ; 3575,4650 3675,4750 3675,5070 3631.37,5113.63 3631.37,5162.09 3622.46,5171 ; 3575,4964.96 3490,4879.96 3490,4251.72 3501.72,4240 4020.41,4240 4032.13,4228.28 4032.13,4133.94 ; 3762.13,3533.94 3762.13,3622.87 3760,3625 ; v1(3770,2500) 3925,2655 3925,2885 4140,3100 4140,3633.93 4209.66,3703.59 4248.59,3703.59 4250,3705 4370,3705 ; v1(3770.74,2400.74) 3770.74,2420.74 3965,2615 3965,2857.43 4190,3082.43 4190,3545 4250,3605 4370,3605 ; 3840.57,5171 3842.27,5169.3 3842.27,5107.73 3875,5075 4037.5,5075 ; 3900,4335 3990,4335 4040,4385 4040,5072.5 4037.5,5075 ; 4032.13,3533.94 4032.13,3625 ; 4235,4975 4235,5040 4200,5075 4037.5,5075 ; 4481.26,3903.85 4263.85,3903.85 ; 5063.74,4766.15 5248.74,4766.15 5433.74,4766.15 5435.38,4764.51 5616.43,4764.51 5618.07,4762.88 5619.13,4763.94 5798.94,4763.94 5800,4765 5980,4765 5980.57,4765.57 6158.17,4765.57 6158.74,4766.15 6159.31,4765.57 6339.43,4765.57 6340,4765 6343.51,4761.49 6343.51,4456.49 ; 5095,3505 5095,3361.09 5261,3195.09 5261,3049 5310,3000 v1(5310,2795) ; 5350,3075 5568.28,3075 5580,3086.72 5580,3205 5695,3320 5840,3320 ; 5420,4215 5490,4215 5515,4190 5515,3950 ; 5435.41,3881.47 5503.28,3881.47 5515,3893.19 5515,3950 ; v1(5915,4055) 5810,3950 5515,3950 ; 5955,3930.24 6179.5,3705.74 6224.26,3705.74 v1(6230,3700) ; 6250,4220 6333.28,4220 6345,4231.72 6345,4455 6343.51,4456.49 ; 6800,4615 6800,4485 6771.49,4456.49 6562.56,4456.49 6343.51,4456.49 ; 7010,1885 7016.72,1878.28 7016.72,1828.28 7085,1760 7130,1760 7145,1745 7145,1685 ; 7045,1685 7040.47,1689.53 7040.47,1744.53 6975,1810 6870,1810 6850,1830 6850,2375 6865,2390 7545,2390 ; 7188.85,2773.74 7070,2892.59 7070,3015 7105,3050 7285,3050 ; v1(7485,1480) 7620,1480 v1(7645,1455) ; 7650,2610 7795,2610 v1(7855,2550) ; 7790,1307.5 7795,1312.5 v1(7795,1705) ; 7803.74,4251.15 7903.85,4251.15 7915.57,4262.86 7915.57,4539.43 7868.65,4586.35 ; 7803.74,4351.15 7756.72,4351.15 7745,4339.43 7745,4176.72 7756.72,4165 8090,4165 8140,4215 8140,4477.59 8146.26,4483.85 9166.15,4483.85 9200,4450 9200,4255 9185,4240 ; v1(7850,2055) 7890,2095 8130,2095 ; v1(7860,2735) 7860,2745 7980,2865 ; v1(7915,1455) v1(7915,1725) ; 8525,2535 9205,2535 9230,2560 ; 8530,2095 8665,2095 8725,2035 8880,2035 8980,2035 9220,2035 9230,2025 ; 3510,3625 3760,3625 ; 3760,3625 4032.13,3625 ; 4032.13,3625 4032.13,3672.13 4263.85,3903.85
  Bottom Layer w30: 6562.56,1315.07 6570.13,1307.5
  Bottom Layer w50: 3480,1895 3480,1336.79 3509.29,1307.5 6570.13,1307.5 7790,1307.5 8270,1307.5 ; 6562.56,1315.07 6562.56,1696.49 ; 8270,1510 8270,1307.5 ; 8500,1510 8500,1645 8530,1675 8840,1675 8930,1765 9200.71,1765 9230,1794.29 9230,2025 9230,2560 9230,2755 ; 8685,1510 8685,1351.79 8640.71,1307.5 8270,1307.5 ; 8781.3,3303.2 8781.3,2940.67 ; 8802.13,3333.94 8811.6,3333.94 8981.4,3503.74 8983.85,3503.74 ; 8881.3,3000.67 8872.03,2991.4 8845.13,2991.4 8794.4,2940.67 8781.3,2940.67 ; 9185,4240 9185,4226.9 9230,4181.9 9230,2755 ; 8781.3,2940.67 8966.97,2755 9230,2755
  other v1: 7210,3160

## Keep-outs
Keep-Out Layer:
  lines w10: 9335,905 9340,910
  lines w15: 2445,1265 3427.5,1265 9310,1265 9310,5560 2445,5560 2445,1265

## Other copper
Top Layer:
  text "+" at 7181.67,4710 h20 r270
  text "+" at 7381.67,4705 h20 r270
  text "+" at 7621.67,4695 h20 r270
  text "14010120" at 8325,4685 h50
  text "+" at 7806.67,4425 h20 r270
  text "towzinnegar.ir" at 8180,4336.66 h50
  text "+" at 7801.67,4190 h20 r270
  text "+" at 5775,3796.67 h20
  text "+" at 9065,2876.67 h20
  text "1" at 6360,2540 h20
Bottom Layer:
  text "towzinnegar.ir" at 8825,4336.66 h50

## Silkscreen, mask and mechanical layers (free items; w line width, h text height)
Bottom Overlay:
  lines w10: 4812.56,3496.49 4837.56,3471.49 4837.56,2696.49 4862.56,2671.49 4837.56,2646.49 4837.56,1903.56 4817.79,1883.79 ; 4812.56,3646.49 4837.56,3671.49 4837.56,3846.49 4862.56,3871.49 4837.56,3896.49 4837.56,4071.49 4812.56,4096.49 ; 6312.56,4396.49 6312.56,3771.49 6287.56,3746.49 6312.56,3721.49 6312.56,3021.49 6337.56,2996.49 ; 6412.56,2071.49 6387.56,2096.49 6387.56,2571.49 6362.56,2596.49 6387.56,2621.49 6387.56,3121.49 6412.56,3146.49
  text "AREF" at 6482.56,4556.49 h20 r135
  text "GND" at 6482.56,4456.49 h20 r135
  text "PWM13" at 6482.56,4356.49 h20 r135
  text "PWM12" at 6482.56,4256.49 h20 r135
  text "RESET" at 4737.56,4196.49 h20 r315
  text "PWM11" at 6482.56,4156.49 h20 r135
  text "3v3" at 4737.56,4096.49 h20 r315
  text "PWM10" at 6482.56,4056.49 h20 r135
  text "5v" at 4737.56,3996.49 h20 r315
  text "PWM9" at 6482.56,3956.49 h20 r135
  text "GND" at 4737.56,3896.49 h20 r315
  text "PWM8" at 6482.56,3856.49 h20 r135
  text "GND" at 4737.56,3796.49 h20 r315
  text "Vin" at 4737.56,3696.49 h20 r315
  text "PWM7" at 6480.49,3696.49 h20 r135
  text "PWM6" at 6480.49,3596.49 h20 r135
  text "AD0" at 4737.56,3496.49 h20 r315
  text "PWM5" at 6480.49,3496.49 h20 r135
  text "AD1" at 4737.56,3396.49 h20 r315
  text "PWM4" at 6480.49,3396.49 h20 r135
  text "AD2" at 4737.56,3296.49 h20 r315
  text "PWM3" at 6480.49,3296.49 h20 r135
  text "AD3" at 4737.56,3196.49 h20 r315
  text "PWM2" at 6487.56,3196.49 h20 r135
  text "AD4" at 4737.56,3096.49 h20 r315
  text "TX0" at 6487.56,3096.49 h20 r135
  text "AD5" at 4737.56,2996.49 h20 r315
  text "RX0" at 6487.56,2996.49 h20 r135
  text "AD6" at 4737.56,2896.49 h20 r315
  text "AD7" at 4737.56,2796.49 h20 r315
  text "TX3" at 6487.56,2796.49 h20 r135
  text "RX3" at 6487.56,2696.49 h20 r135
  text "AD8" at 4737.56,2596.49 h20 r315
  text "TX2" at 6487.56,2596.49 h20 r135
  text "AD9" at 4737.56,2496.49 h20 r315
  text "RX2" at 6487.56,2496.49 h20 r135
  text "AD10" at 4737.56,2396.49 h20 r315
  text "TX1" at 6487.56,2396.49 h20 r135
  text "AD11" at 4737.56,2296.49 h20 r315
  text "RX1" at 6487.56,2296.49 h20 r135
  text "AD12" at 4737.56,2196.49 h20 r315
  text "SDA" at 6487.56,2196.49 h20 r135
  text "AD13" at 4737.56,2096.49 h20 r315
  text "SCL" at 6487.56,2096.49 h20 r135
  text "AD14" at 4737.56,1996.49 h20 r315
  text "GND" at 4862.56,1921.49 h20 r225
  text "52" at 4962.56,1921.49 h20 r225
  text "50" at 5062.56,1921.49 h20 r225
  text "48" at 5162.56,1921.49 h20 r225
  text "46" at 5262.56,1921.49 h20 r225
  text "44" at 5362.56,1921.49 h20 r225
  text "42" at 5462.56,1921.49 h20 r225
  text "40" at 5562.56,1921.49 h20 r225
  text "38" at 5662.56,1921.49 h20 r225
  text "36" at 5762.56,1921.49 h20 r225
  text "34" at 5862.56,1921.49 h20 r225
  text "32" at 5962.56,1921.49 h20 r225
  text "30" at 6062.56,1921.49 h20 r225
  text "28" at 6162.56,1921.49 h20 r225
  text "26" at 6262.56,1921.49 h20 r225
  text "24" at 6362.56,1921.49 h20 r225
  text "22" at 6462.56,1921.49 h20 r225
  text "5V" at 6562.56,1921.49 h20 r225
  text "AD15" at 4737.56,1896.49 h20 r315
  text "GND" at 4837.56,1621.49 h20 r315
  text "53" at 4937.56,1621.49 h20 r315
  text "51" at 5037.56,1621.49 h20 r315
  text "49" at 5137.56,1621.49 h20 r315
  text "47" at 5237.56,1621.49 h20 r315
  text "45" at 5337.56,1621.49 h20 r315
  text "43" at 5437.56,1621.49 h20 r315
  text "41" at 5537.56,1621.49 h20 r315
  text "39" at 5637.56,1621.49 h20 r315
  text "37" at 5737.56,1621.49 h20 r315
  text "35" at 5837.56,1621.49 h20 r315
  text "33" at 5937.56,1621.49 h20 r315
  text "31" at 6037.56,1621.49 h20 r315
  text "29" at 6137.56,1621.49 h20 r315
  text "27" at 6237.56,1621.49 h20 r315
  text "25" at 6337.56,1621.49 h20 r315
  text "23" at 6437.56,1621.49 h20 r315
  text "5V" at 6537.56,1621.49 h20 r315
Mechanical 1:
  circle w5: c6562.56,4896.49 r62.99
  circle w5: c4862.56,2896.49 r62.99
  circle w5: c4662.56,4946.49 r62.99
  circle w5: c5962.56,2896.49 r62.99
  circle w5: c6562.56,1946.49 r62.99
  circle w5: c4662.56,1696.49 r62.99
  lines w5: 4562.56,1596.49 4562.56,5496.49 6662.56,5496.49 6662.56,1696.49 6562.56,1596.49 6162.56,1596.49 6062.56,1496.49 4712.56,1496.49 4612.56,1596.49 4562.56,1596.49

## Text inside footprints (layer, text, board x,y; h text height)
ADC1: Top Overlay "10" at 8966,1962 h39.37 r270; Top Overlay "9" at 8851.06,1955.94 h39.37 r270; Top Overlay "2" at 8955,2555 h39.37 r270; Top Overlay "1" at 8857.06,2548.94 h39.37 r270
BT1: Top Overlay "+" at 7070,3920 h78.74 r270
C46: Top Overlay "+" at 5206.57,3597.47 h60 r180
CNPRN: Top Overlay "1" at 4913.41,5028.23 h59.05; Top Overlay "13" at 6183.37,5028.23 h59.05; Top Overlay "14" at 4933.31,5402.24 h59.05; Top Overlay "25" at 6124.1,5402.24 h59.05; Top Overlay "D25F-RA" at 5299.5,5221.09 h78.74
DB9A: Top Overlay "6" at 8773.86,5351 h39.37; Top Overlay "9" at 8442.86,5346 h39.37; Top Overlay "5" at 8377.95,5055.1 h39.37; Top Overlay "1" at 8842,5049 h39.37
DB9B: Top Overlay "6" at 7487.5,5342.9 h39.37; Top Overlay "9" at 7156.5,5337.9 h39.37; Top Overlay "5" at 7091.6,5047 h39.37; Top Overlay "1" at 7555.65,5040.9 h39.37
DB?: Top Overlay "6" at 3992.5,5352.9 h39.37; Top Overlay "9" at 3661.5,5347.9 h39.37; Top Overlay "5" at 3596.6,5057 h39.37; Top Overlay "1" at 4060.64,5050.9 h39.37
FT810: Top Overlay "1" at 8011.06,2412.06 h39.37; Top Overlay "2" at 8005,2510 h39.37; Top Overlay "9" at 8604.06,2406.06 h39.37; Top Overlay "10" at 8598,2521 h39.37
JTAG: Top Overlay "1" at 8016.06,1972.06 h39.37; Top Overlay "2" at 8010,2070 h39.37; Top Overlay "9" at 8609.06,1966.06 h39.37; Top Overlay "10" at 8603,2081 h39.37
MMC: Top Overlay "2" at 6845,1665 h50; Top Overlay "1" at 6845,1565 h50; Top Overlay "15" at 7705,1565 h50; Top Overlay "16" at 7705,1665 h50
Pmmc: Top Overlay "3" at 7530,2450 h50 r270; Top Overlay "4" at 7630,2450 h50 r270; Top Overlay "2" at 7630,2710 h50 r270; Top Overlay "1" at 7530,2690 h50 r270
Q1: Top Overlay "E" at 5495.41,3861.47 h31.5; Top Overlay "C" at 5495.41,3641.47 h31.5; Top Overlay "B" at 5495.41,3761.47 h31.5
Q2: Top Overlay "E" at 5480,4195 h31.5; Top Overlay "C" at 5480,3975 h31.5; Top Overlay "B" at 5480,4095 h31.5
Q3: Top Overlay "E" at 5900,3300 h31.5; Top Overlay "C" at 5900,3080 h31.5; Top Overlay "B" at 5900,3200 h31.5